# Altium PCB PCB1.PcbDoc
Units mm, origin at the board's own origin, x right, y up, seen from the top; angles counter-clockwise.
Board outline 152.4 x 101.6 mm, 2 copper layers (Top Layer, Bottom Layer); 16 components, 16 nets, 70 pads, 0 vias.
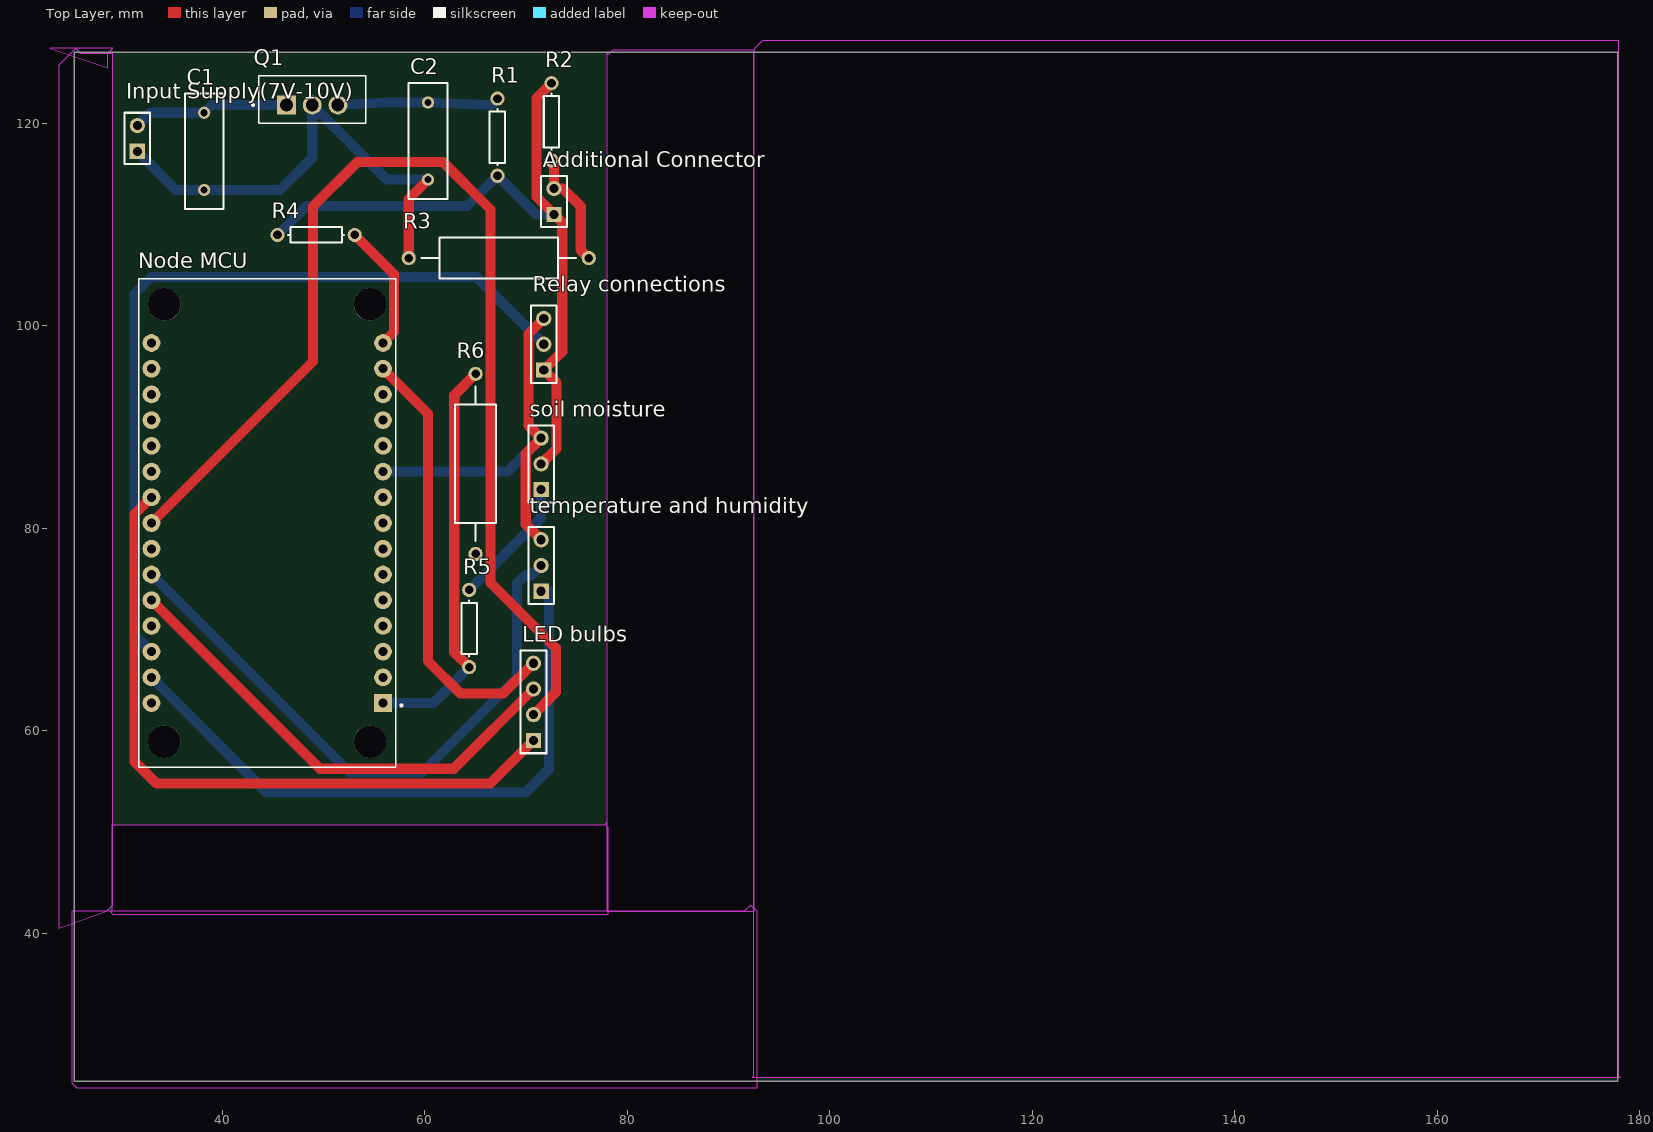
[diagram p0: Top Layer view]
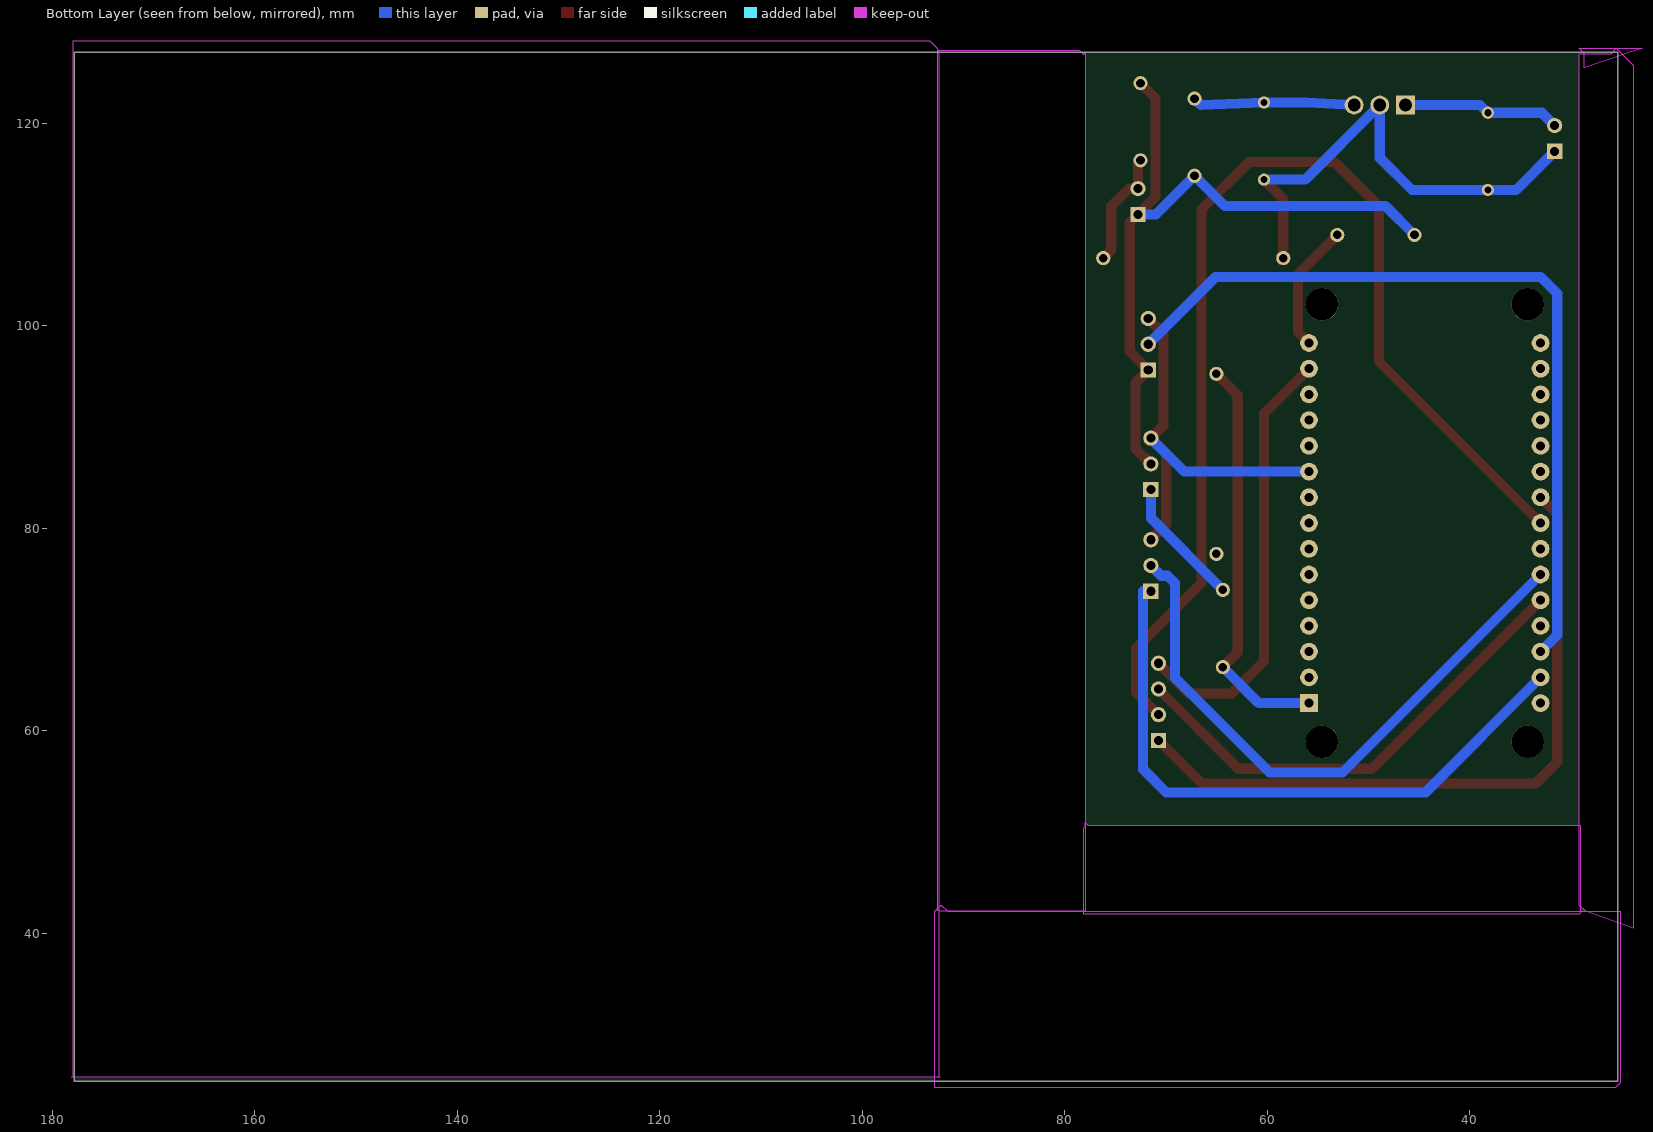
[diagram p1: Bottom Layer view, seen from below]

## Layer stack, top to bottom
Top Solder: solder mask 0.0102, Solder Resist, Dk 3.5
Top Layer: signal copper 0.0356
Dielectric 1: dielectric 0.32, FR-4, Dk 4.8
Bottom Layer: signal copper 0.0356
Bottom Solder: solder mask 0.0102, Solder Resist, Dk 3.5

## Board outline
25.4,25.4 177.8,25.4 177.8,127 25.4,127
cut-out: 38.481,136.525 57.404,136.525 57.785,136.144
cut-out: 28.702,125.476 28.702,126.873 29.21,127.381 22.987,127.381
cut-out: 63.373,131.445 25.781,131.445 25.019,132.207
cut-out: 28.575,42.164 29.21,42.799 29.21,126.873 26.035,126.873 25.527,127.381 23.876,125.73 23.876,40.513
cut-out: 92.202,42.799 91.567,42.164 25.146,42.164 25.146,25.273 25.654,24.765 92.837,24.765 92.837,42.164
cut-out: 92.456,127 92.456,25.908 92.329,25.781 178.054,25.781 177.927,25.908 177.927,128.143 93.345,128.143 92.583,127.381
cut-out: 77.978,127 77.978,42.164 92.456,42.164 92.519,42.227 92.519,127.191 78.549,127.191 78.105,126.746
cut-out: 77.978,50.927 77.724,50.673 29.083,50.673 29.083,42.291 28.956,42.164 29.21,41.91 78.105,41.91 78.105,50.419 77.978,50.546

## Design rules (kind name [scope] priority, off if disabled: settings)
Clearance [All] p1: gap=0.254 ignorepadtopadclearanceinfootprint=FALSE except(0: Arc-Hole Track-Hole SMDPad-Hole THPad-Hole Via-Hole Fill-Hole Poly-Hole Region-Hole Text-Hole)
PolygonConnect [All] p1: connectstyle=Relief reliefconductorwidth=0.254 reliefentries=4 polygonreliefangle="90 Angle" airgapwidth=0.254
RoomDefinition Sheet2 [InComponentClass('Sheet2')] p1: confinementstyle=ConfineIn formatcopy=TRUE lockcomponents=FALSE outline 178.943,26.797 400.685,26.797 400.685,78.613 178.943,78.613
RoutingVias [All] p1: holewidth=0.711 width=1.27 viastyle="Through Hole" minholewidth=0.711 minwidth=1.27 maxholewidth=0.711 maxwidth=1.27
SolderMaskExpansion [All] p1: expansion=0.102
Width [All] p1: maxlimit=1 minlimit=1 preferedwidth=1 minimp=50.000000 maximp=50.000000 favimp=50.000000
30 further rules are at their usual default settings.

## Components (designator, comment, footprint, x,y, rotation, side; value= is the part's Value field where it differs from the comment)
"Additional Connector" "Header 2" HDR1X2 72.771,110.998 r90 top
C1 "Cap" RAD-0.3 38.227,117.221 r90 top value=0.33uF
C2 "Cap" RAD-0.3 60.325,118.237 r90 top value=0.1uF
"Input Supply(7V-10V)" "Header 2" HDR1X2 31.623,117.221 r90 top
"LED bulbs" "Header 4" HDR1X4 70.739,59.055 r90 top
"Node MCU" "ZC563900" MODULE_ZC563900 44.45,80.518 r180 top
Q1 "LM7805CT/NOPB" TO254P1054X470X2600-3 46.355,121.793 r0 top
R1 "Res1" AXIAL-0.3 67.183,118.618 r270 top value=100
R2 "Res1" AXIAL-0.3 72.517,120.142 r90 top value=330
R3 "Res Adj1" AXIAL-0.7 67.31,106.68 r0 top value=1K
R4 "Res1" AXIAL-0.3 49.276,108.966 r180 top value=100
R5 "Res1" AXIAL-0.3 64.389,70.104 r90 top value=1K
R6 "Res Adj1" AXIAL-0.7 65.024,86.36 r90 top value=5K
"Relay connections" "Header 3" HDR1X3 71.755,95.631 r90 top
"soil moisture" "Header 3" HDR1X3 71.501,83.82 r90 top
"temperature and humidity" "Header 3" HDR1X3 71.501,73.787 r90 top

## Footprints (in the part's own frame and the unit in brackets; to place one, negate y for a bottom-side part, rotate by r counter-clockwise, add the part's x,y. Pads: shape width x height; smd on the part's side, far side on the other; paste and mask are expansions set on the pad)
AXIAL-0.3 [mm] "Axial Device, Thru-Hole; 2 Leads; 0.3 in Pin Spacing"
  round 1.4 hole 0.85: 1(-3.81,0) 2(3.81,0)
  silkscreen extent -2.77,-0.76 2.77,0.76
AXIAL-0.7 [mm] "Axial Device, Thru-Hole; 2 Leads; 0.7 in Pin Spacing"
  round 1.4 hole 0.85: 1(-8.89,0) 2(8.89,0)
  silkscreen extent -7.62,-2.03 7.62,2.03
HDR1X2 [mm] "Connector; Header; 2 Position"
  rect 1.5x1.5 hole 0.9: 1(0,0)
  round 1.5 hole 0.9: 2(2.54,0)
  silkscreen extent -1.27,-1.27 3.81,1.27
HDR1X3 [mm] "Connector; Header; 3 Position"
  rect 1.5x1.5 hole 0.9: 1(0,0)
  round 1.5 hole 0.9: 2(2.54,0) 3(5.08,0)
  silkscreen extent -1.27,-1.27 6.35,1.27
HDR1X4 [mm] "Connector; Header; 4 Position"
  rect 1.5x1.5 hole 0.9: 1(0,0)
  round 1.5 hole 0.9: 2(2.54,0) 3(5.08,0) 4(7.62,0)
  silkscreen extent -1.27,-1.27 8.89,1.27
MODULE_ZC563900 [mil]
  rect 69x69 hole 35: 1(-450,700)
  round 69 hole 35: 2(-450,600) 3(-450,500) 4(-450,400) 5(-450,300) 6(-450,200) 7(-450,100) 8(-450,0) 9(-450,-100) 10(-450,-200) 11(-450,-300) 12(-450,-400) 13(-450,-500) 14(-450,-600) 15(-450,-700) 16(450,-700) 17(450,-600) 18(450,-500) 19(450,-400) 20(450,-300) 21(450,-200) 22(450,-100) 23(450,0) 24(450,100) 25(450,200) 26(450,300) 27(450,400) 28(450,500) 29(450,600) 30(450,700)
  round 125.98 hole 125.98 unplated: ""(-400,850) ""(-400,-850) ""(400,850) ""(400,-850)
  silkscreen extent -526,-950 500,950
RAD-0.3 [mm] "Radial Cap, Thru-Hole; 2 Leads; 0.3 in Pin Spacing"
  round 1.2 hole 0.7: 1(-3.81,0) 2(3.81,0)
  silkscreen extent -5.71,-1.91 5.71,1.91
TO254P1054X470X2600-3 [mm]
  rect 1.86x1.86 hole 1.24: 1(0,0)
  round 1.86 hole 1.24: 2(2.54,0) 3(5.08,0)
  silkscreen extent -3.41,-1.8 7.81,2.9

## Part data
"Additional Connector" "Input Supply(7V-10V)": "Header, 2-Pin", LatestRevisionDate=17-Jul-2002, LatestRevisionNote="Re-released for DXP Platform.", Publisher="Altium Limited"
C1 C2: "Capacitor", LatestRevisionDate=17-Jul-2002, LatestRevisionNote="Re-released for DXP Platform.", PackageDescription="Radial Cap, Thru-Hole; 2 Leads; 0.3 in Pin Spacing", PackageReference=RAD-0.3, Published=8-Jun-2000, Publisher="Altium Limited"
"LED bulbs": "Header, 4-Pin", LatestRevisionDate=17-Jul-2002, LatestRevisionNote="Re-released for DXP Platform.", Publisher="Altium Limited"
"Node MCU": "NodeMcu Lua ESP8266 WIFI Internet of Things Network Development Module Board", Package=None, Availability=Unavailable, MF=YKS, MP=ZC563900, Price=None, SnapEDA_Link=https://www.snapeda.com/parts/ZC563900/YKS/view-part/607853/?ref=snap
Q1: "Linear Voltage Regulator IC 1 Output 1A TO-220-3", Package="TO-220 ON Semiconductor", Availability=Unavailable, MF="ON Semiconductor", MP=LM7805CT, Price=None, SnapEDA_Link=https://www.snapeda.com/parts/LM7805CT/ON%20Semiconductor/view-part/546231/?ref=snap
R1 R2 R4 R5: "Resistor", LatestRevisionDate=17-Jul-2002, LatestRevisionNote="Re-released for DXP Platform.", PackageDescription="Axial Device, Thru-Hole; 2 Leads; 0.3 in Pin Spacing", PackageReference=AXIAL-0.3, Published=8-Jun-2000, Publisher="Altium Limited"
R3 R6: "Variable Resistor", LatestRevisionDate=17-Jul-2002, LatestRevisionNote="Re-released for DXP Platform.", PackageDescription="Axial Device, Thru-Hole; 2 Leads; 0.7 in Pin Spacing", PackageReference=AXIAL-0.7, Published=8-Jun-2000, Publisher="Altium Limited", Set Position=0.5
"Relay connections" "soil moisture" "temperature and humidity": "Header, 3-Pin", LatestRevisionDate=17-Jul-2002, LatestRevisionNote="Re-released for DXP Platform.", Publisher="Altium Limited"

## Nets (pads, with @x,y where several pads share a name; then routed paths per layer and width w, separated by ;. In a path a pad name is that pad's centre, name@x,y a point inside that pad or via, vN(x,y) a via of type N, cw(c..) or ccw(c..) an arc to the next point about the centre after c; other vN are vias at no path point)
GND: "Input Supply(7V-10V).1" C1.1 C2.1 Q1.2 R3.1 | length 48.4
  Top Layer w1: R3.1 58.42,112.522 C2.1
  Bottom Layer w1: 31.623,117.221 35.433,113.411 C1.1 45.72,113.411 48.895,116.586 Q1.2 56.261,114.427 C2.1
"NetAdditional Connector_1": "Additional Connector.1" "Relay connections.1" "soil moisture.2" R1.2 R2.2 R4.2 | length 72.5
  Top Layer w1: 71.501,86.36 73.025,87.884 73.025,94.361 71.755,95.631 73.584,97.46 73.584,110.185 72.771,110.998 71.044,112.725 71.044,122.479 R2.2
  Bottom Layer w1: R4.2 48.311,111.811 64.186,111.811 R1.2 70.993,110.998 72.771,110.998
"NetAdditional Connector_2": "Additional Connector.2" R2.1 R3.2 | length 11.8
  Top Layer w1: R2.1 72.517,116.296 72.771,116.296 72.771,113.538 73.66,113.538 75.413,111.785 75.413,107.467 R3.2
NetC1_2: "Input Supply(7V-10V).2" C1.2 Q1.1 | length 15.6
  Bottom Layer w1: 31.623,119.761 32.893,121.031 C1.2 38.989,121.793 Q1.1
NetC2_2: C2.2 Q1.3 R1.1 | length 16
  Bottom Layer w1: Q1.3 56.134,122.047 C2.2 66.561,121.806 R1.1
"NetLED bulbs_1": "LED bulbs.1" "Node MCU.22" | length 68.8
  Top Layer w1: 33.02,83.058 31.369,81.407 31.369,56.947 33.503,54.813 66.497,54.813 70.739,59.055
"NetLED bulbs_2": "LED bulbs.2" "Node MCU.23" | length 112.6
  Top Layer w1: 33.02,80.518 48.971,96.469 48.971,111.785 53.34,116.154 61.824,116.154 66.497,111.481 66.497,74.625 72.949,68.174 72.949,63.805 70.739,61.595
"NetLED bulbs_3": "LED bulbs.3" "Node MCU.26" | length 47.9
  Top Layer w1: 33.02,72.898 49.657,56.261 62.865,56.261 70.739,64.135
"NetLED bulbs_4": "LED bulbs.4" "Node MCU.14" | length 43.7
  Top Layer w1: 55.88,95.758 60.325,91.313 60.325,66.878 63.5,63.703 67.767,63.703 70.739,66.675
"NetNode MCU_1": "Node MCU.1" R5.1 R6.2 | length 40.4
  Top Layer w1: R5.1 62.916,67.767 62.916,93.142 R6.2
  Bottom Layer w1: 55.88,62.738 60.833,62.738 R5.1
"NetNode MCU_10": "Node MCU.10" "Relay connections.3" "soil moisture.3" "temperature and humidity.3" | length 41.3
  Top Layer w1: 71.501,78.867 69.977,80.391 69.977,87.376 71.501,88.9 70.231,90.17 70.231,99.187 71.755,100.711
  Bottom Layer w1: 55.88,85.598 68.199,85.598 71.501,88.9
"NetNode MCU_15": "Node MCU.15" R4.1 | length 12.7
  Top Layer w1: R4.1 56.972,105.08 56.972,99.39 55.88,98.298
"NetNode MCU_25": "Node MCU.25" "temperature and humidity.2" | length 60.5
  Bottom Layer w1: 33.02,75.438 52.578,55.88 59.766,55.88 69.113,65.227 69.113,74.574 69.85,75.311 70.485,75.311 71.501,76.327
"NetNode MCU_28": "Node MCU.28" "Relay connections.2" | length 79.9
  Bottom Layer w1: 33.02,67.818 31.369,69.469 31.369,103.175 33.02,104.826 65.1,104.826 71.755,98.171
"NetNode MCU_29": "Node MCU.29" "temperature and humidity.1" | length 63.3
  Bottom Layer w1: 33.02,65.278 44.399,53.899 69.952,53.899 72.263,56.21 72.263,73.787 71.501,73.787
NetR5_2: "soil moisture.1" R5.2 | length 12.9
  Bottom Layer w1: R5.2 71.501,81.026 71.501,83.82
pads on no net: "Node MCU.2" "Node MCU.3" "Node MCU.4" "Node MCU.5" "Node MCU.6" "Node MCU.7" "Node MCU.8" "Node MCU.9" "Node MCU.11" "Node MCU.12" "Node MCU.13" "Node MCU.16" "Node MCU.17" "Node MCU.18" "Node MCU.19" "Node MCU.20" "Node MCU.21" "Node MCU.24" "Node MCU.27" "Node MCU.30" "Node MCU." R6.1